# Altium PCB PCB1.PcbDoc
Units mil, origin at the board's own origin, x right, y up, seen from the top; angles counter-clockwise.
Board outline 3505 x 3705 mil, 2 copper layers (Top Layer, Bottom Layer); 31 components, 22 nets, 141 pads, 12 vias.
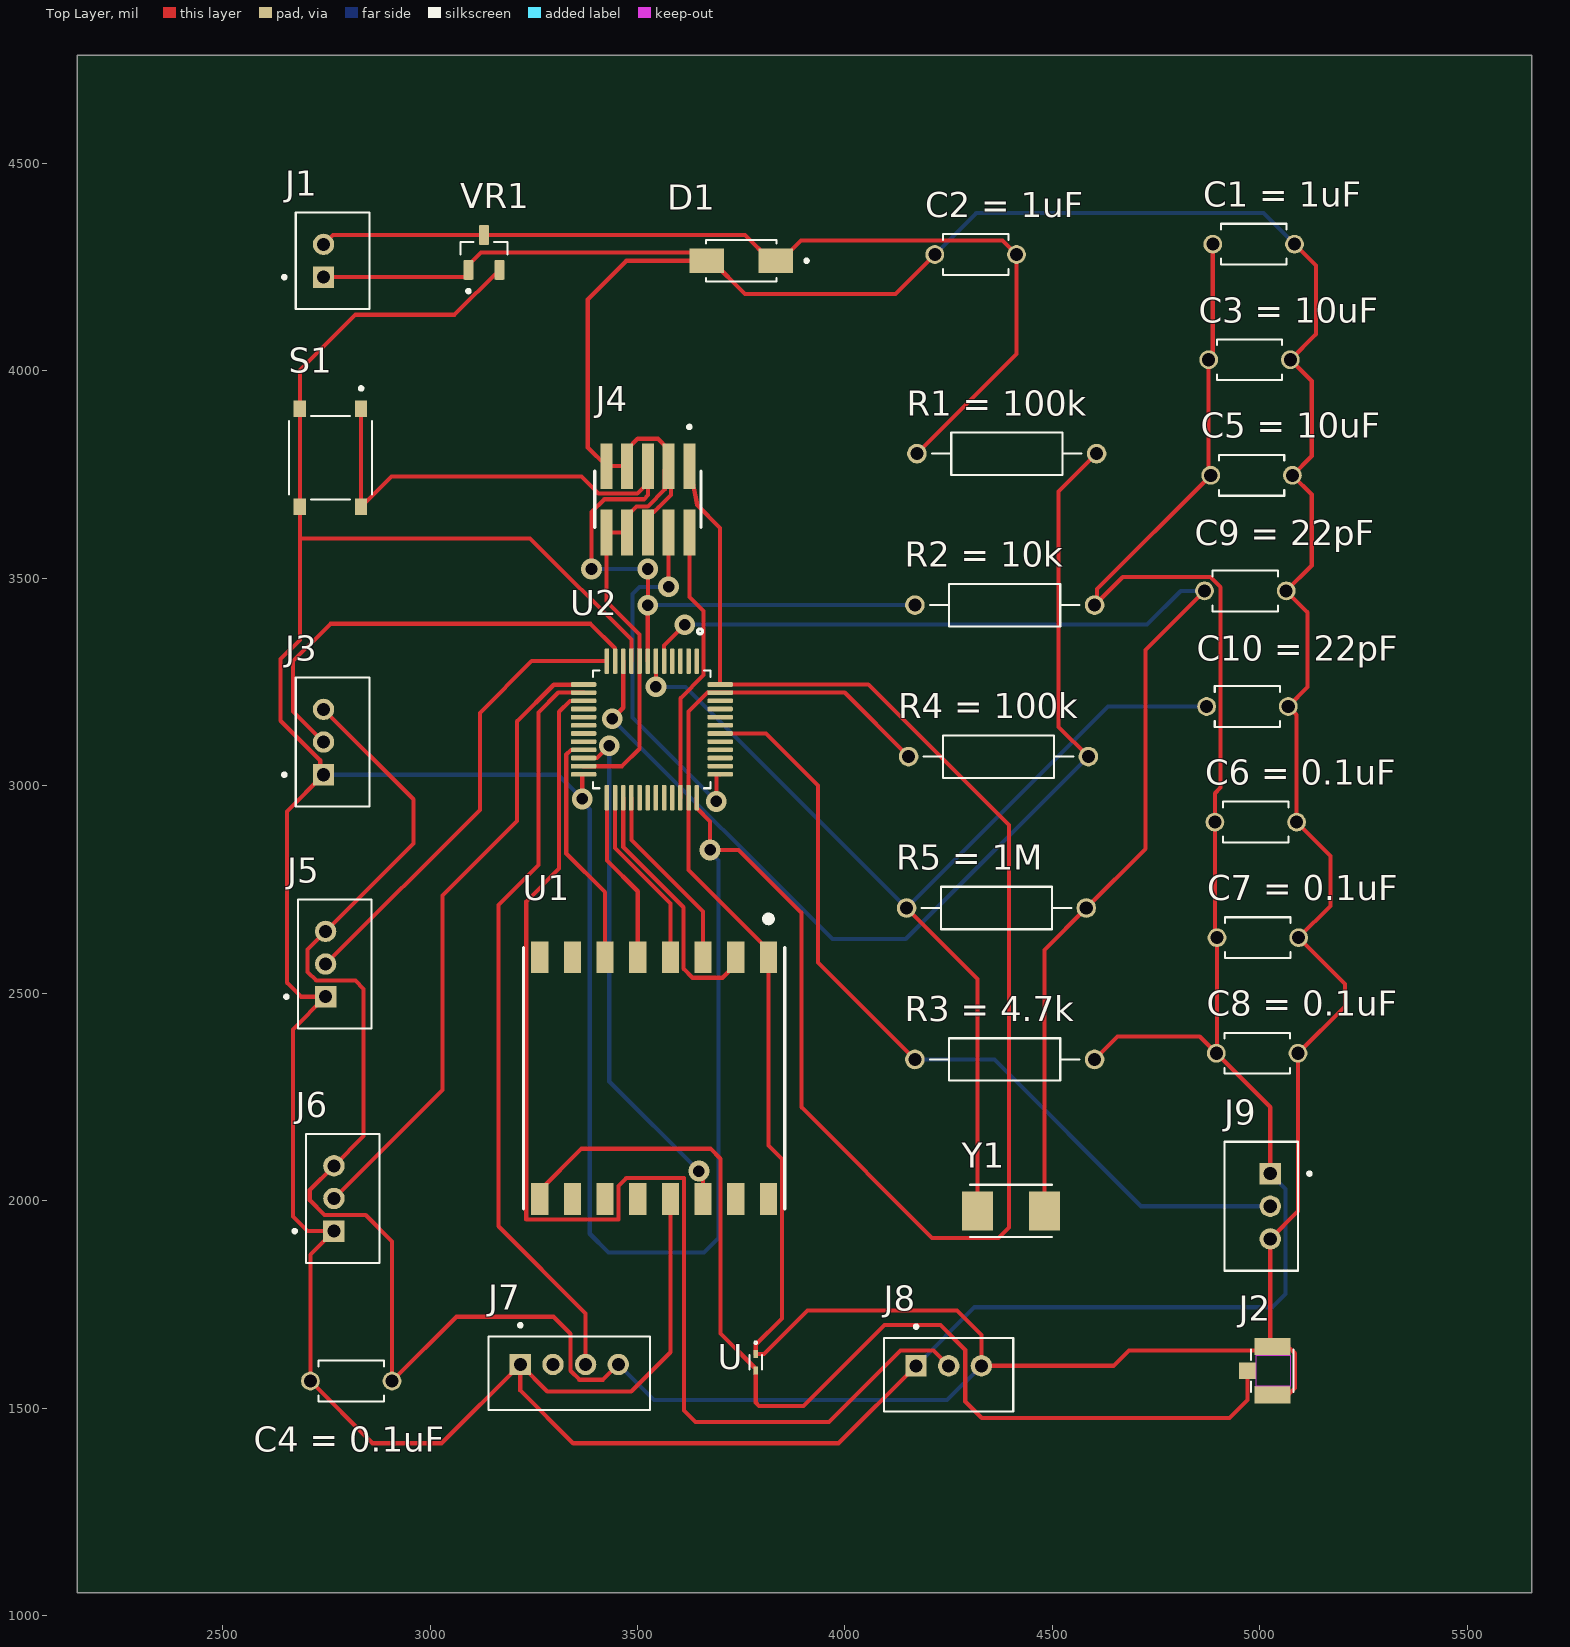
[diagram p0: Top Layer view]
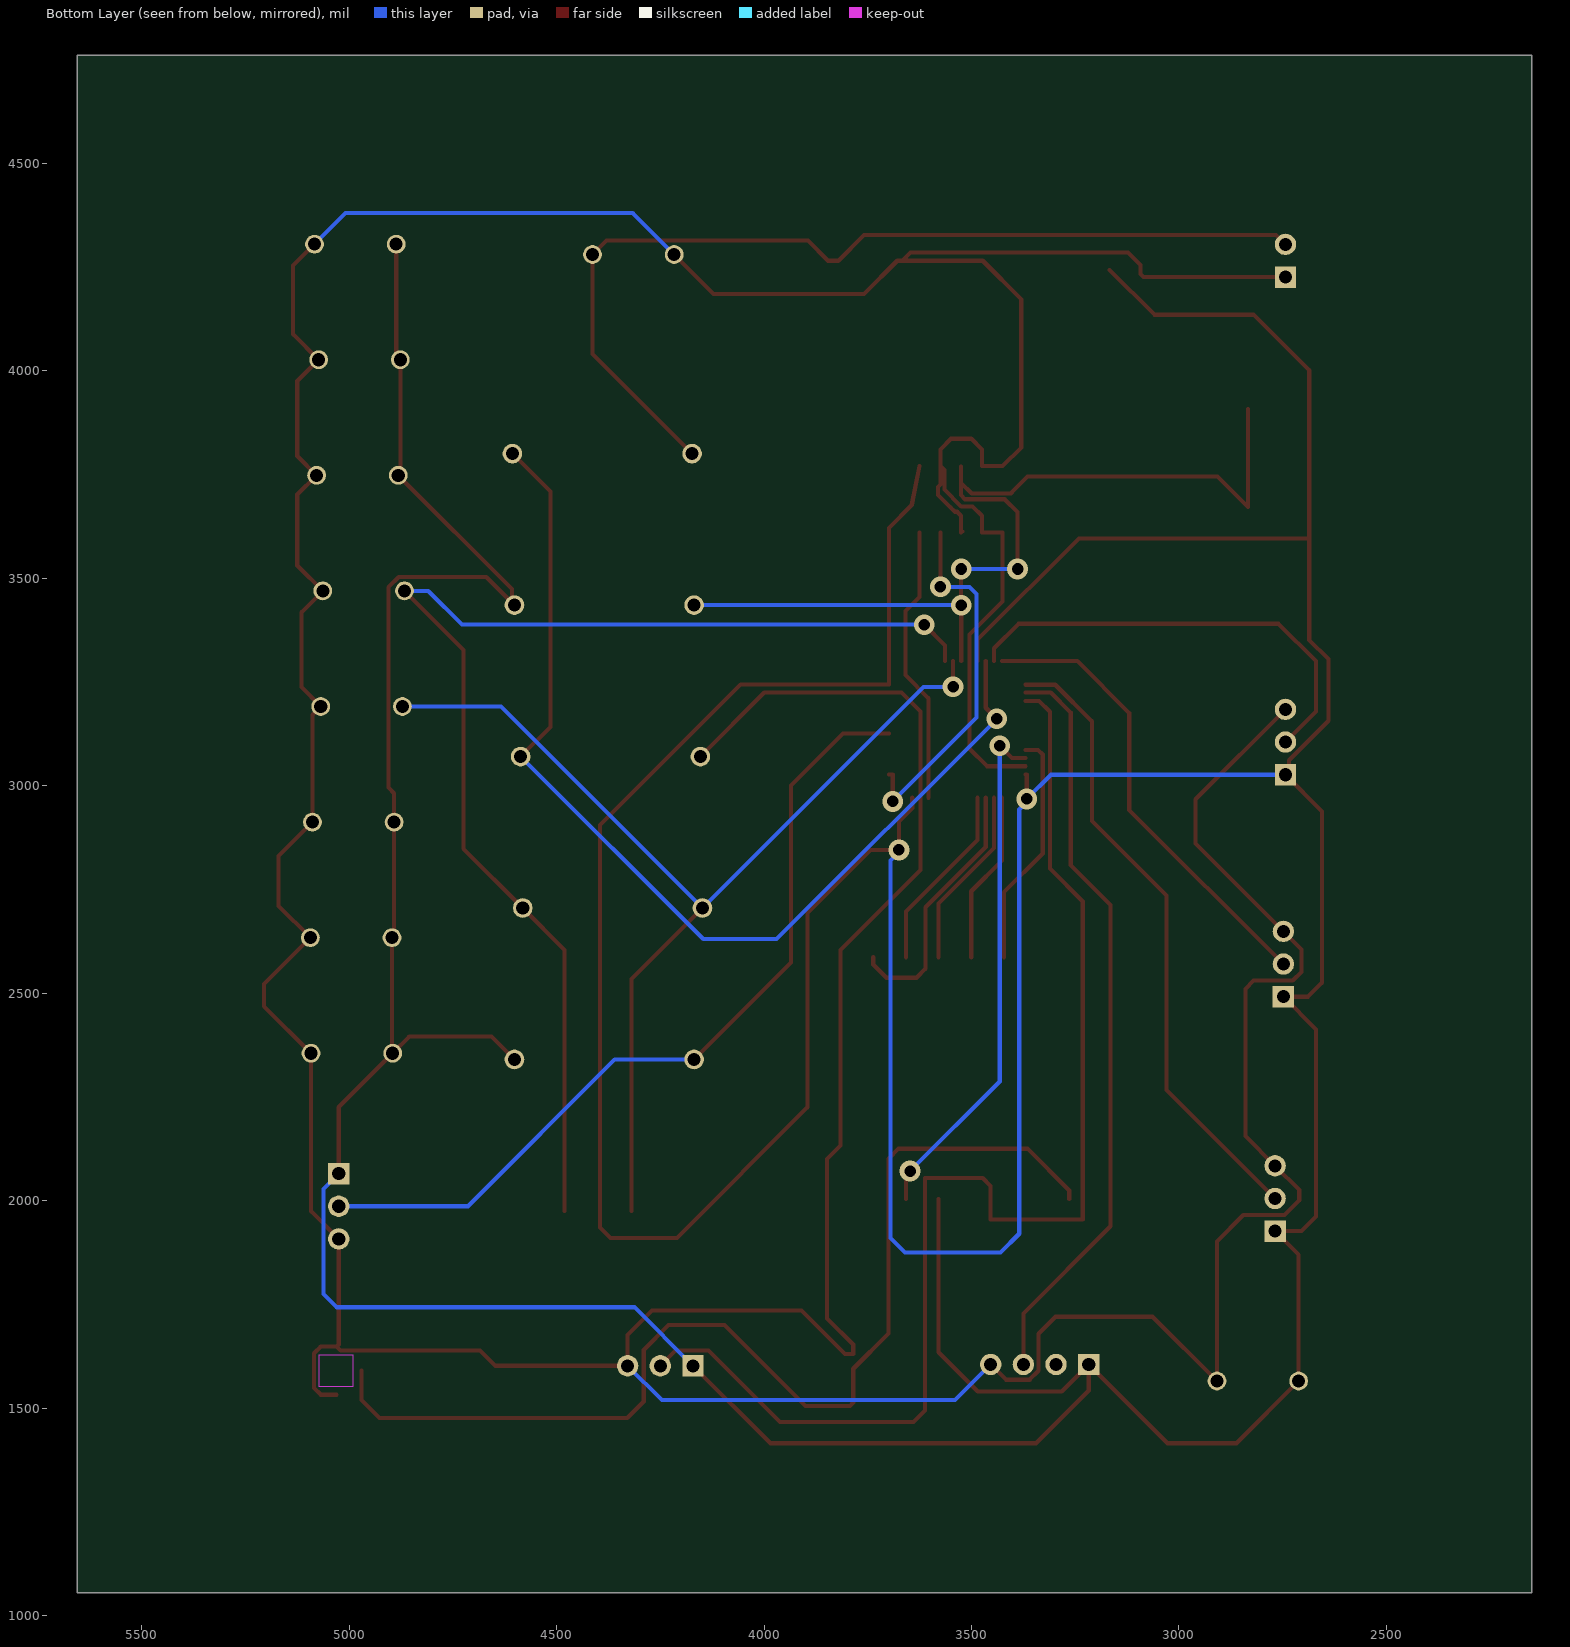
[diagram p1: Bottom Layer view, seen from below]
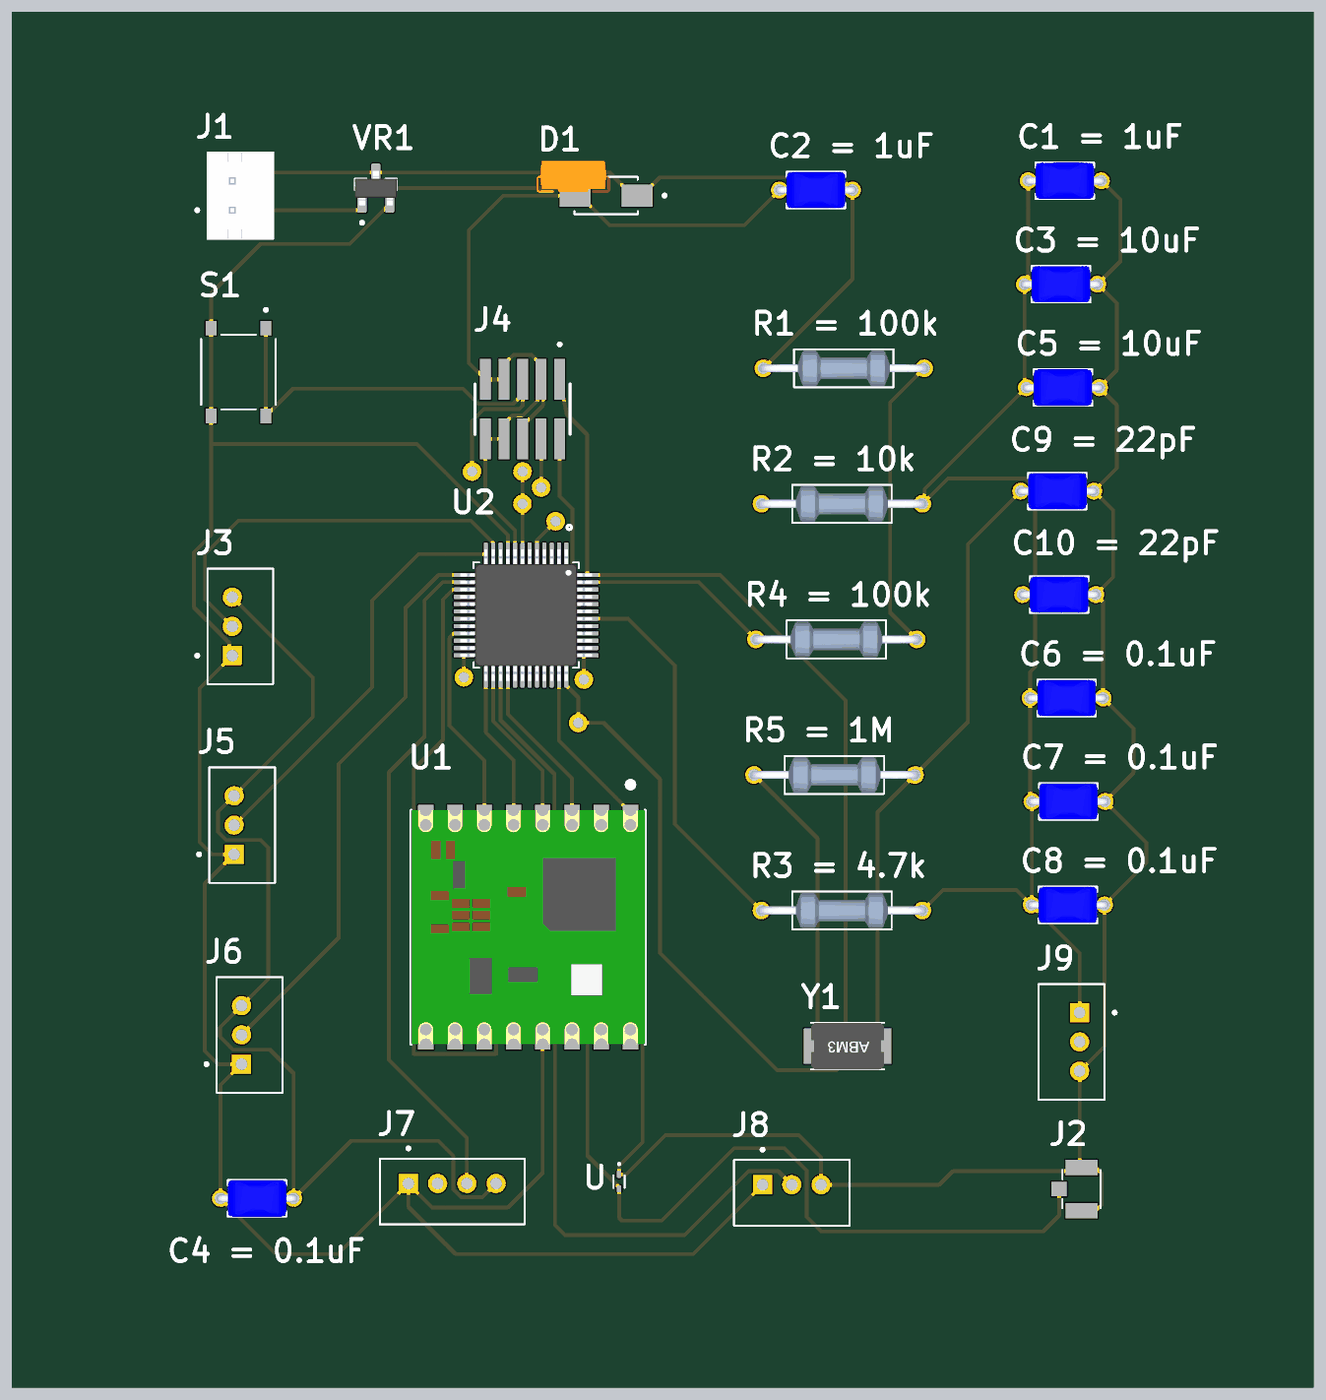
[diagram p2: 3D render of the assembled board from above, using the file's embedded part models]

## Layer stack, top to bottom
Top Solder: solder mask 0.4, Solder Resist, Dk 3.5
Top Layer: signal copper 1.4
Dielectric 1: dielectric 12.6, FR-4, Dk 4.8
Bottom Layer: signal copper 1.4
Bottom Solder: solder mask 0.4, Solder Resist, Dk 3.5

## Board outline
2150,1055 2150,4760 5655,4760 5655,1055

## Design rules (kind name [scope] priority, off if disabled: settings)
Clearance [All] p1: gap=6 ignorepadtopadclearanceinfootprint=TRUE
PolygonConnect [All] p1: connectstyle=Relief reliefconductorwidth=10 reliefentries=4 polygonreliefangle="90 Angle" airgapwidth=10
RoutingVias [All] p1: holewidth=28 width=50 viastyle="Through Hole" minholewidth=28 minwidth=50 maxholewidth=28 maxwidth=50
SolderMaskExpansion [All] p1: expansion=4 istentingtop=FALSE
SupplyNets "Schematic Supply Nets" [InNet('GND')] p1: voltage=0.000
Width [All] p1: maxlimit=10 minlimit=10 preferedwidth=10
30 further rules are at their usual default settings.

## Components (designator, comment, footprint, x,y, rotation, side; value= is the part's Value field where it differs from the comment)
"C1 = 1uF" "FA28X7R1H474KRU06" CAPRB500W50L400T250H550 4985,4305 r180 top (schematic designator C1)
"C2 = 1uF" "FA28X7R1H474KRU06" CAPRB500W50L400T250H550 4315,4280 r0 top (schematic designator C2)
"C3 = 10uF" "FA28X7R1H474KRU06" CAPRB500W50L400T250H550 4975,4026.43 r180 top (schematic designator C3)
"C4 = 0.1uF" "FA28X7R1H474KRU06" CAPRB500W50L400T250H550 2810,1565 r0 top (schematic designator C4)
"C5 = 10uF" "FA28X7R1H474KRU06" CAPRB500W50L400T250H550 4980,3747.86 r0 top (schematic designator C5)
"C6 = 0.1uF" "FA28X7R1H474KRU06" CAPRB500W50L400T250H550 4990,2912.14 r0 top (schematic designator C6)
"C7 = 0.1uF" "FA28X7R1H474KRU06" CAPRB500W50L400T250H550 4995,2633.57 r0 top (schematic designator C7)
"C8 = 0.1uF" "FA28X7R1H474KRU06" CAPRB500W50L400T250H550 4993.43,2355 r0 top (schematic designator C8)
"C9 = 22pF" "FA28X7R1H474KRU06" CAPRB500W50L400T250H550 4965,3469.29 r0 top (schematic designator C9)
"C10 = 22pF" "FA28X7R1H474KRU06" CAPRB500W50L400T250H550 4970,3190.71 r0 top (schematic designator C10)
D1 "SS14" DIOM4325X250N 3750,4265 r180 top
J1 "B2B-PH-K-S" JST_B2B-PH-K-S 2765,4265 r270 top
J2 "U.FL-R-SMT-1(10)" HRS_U.FL-R-SMT-1(10) 5030.04,1590 r270 top
J3 "B3B-PH-K-S" JST_B3B-PH-K-S 2765,3105 r270 top
J4 "FTSH-105-01-X-DV-K-X" SAMTEC_FTSH-105-01-X-DV-K-X 3525,3690 r180 top
J5 "B3B-PH-K-S" JST_B3B-PH-K-S 2770,2570 r270 top
J6 "B3B-PH-K-S" JST_B3B-PH-K-S 2790,2005 r270 top
J7 "B4B-PH-K-S" JST_B4B-PH-K-S 3335.63,1583.35 r180 top
J8 "B3B-PH-K-S" JST_B3B-PH-K-S 4250,1580 r180 top
J9 "B3B-PH-K-S" JST_B3B-PH-K-S 5003.35,1986.26 r90 top
"R1 = 100k" "MFR-25FBF52-10K" RESAD1100W55L680D260 4390,3800 r0 top (schematic designator R1)
"R2 = 10k" "MFR-25FBF52-10K" RESAD1100W55L680D260 4385,3435 r0 top (schematic designator R2)
"R3 = 4.7k" "MFR-25FBF52-10K" RESAD1100W55L680D260 4385,2340 r0 top (schematic designator R3)
"R4 = 100k" "MFR-25FBF52-10K" RESAD1100W55L680D260 4370,3070 r0 top (schematic designator R4)
"R5 = 1M" "MFR-25FBF52-10K" RESAD1100W55L680D260 4365,2705 r0 top (schematic designator R5)
S1 "TS-1187A-B-A-B" SW_TS-1187A-B-A-B 2760,3790 r270 top
U "ESD9B5.0ST5G" SODFL1006X40N 3785,1610.32 r270 top
U1 "RFM95W-868S2" XCVR_RFM95W-868S2 3540,2295 r270 top
U2 "STM32F103C8T6" QFP50P900X900X160-48N 3534.53,3135.43 r270 top
VR1 "MCP1700T-3302E_TT" SOT95P237X112-3N 3130,4285 r90 top
Y1 "ABM3-8.000MHZ-D2Y-T" XTAL_ABM3-8.000MHZ-D2Y-T 4400,1975 r180 top

## Footprints (in the part's own frame and the unit in brackets; to place one, negate y for a bottom-side part, rotate by r counter-clockwise, add the part's x,y. Pads: shape width x height; smd on the part's side, far side on the other; paste and mask are expansions set on the pad)
CAPRB500W50L400T250H550 [mm]
  round 1.15 hole 0.8 mask+0.102: 1(-2.5,0) 2(2.5,0)
  silkscreen extent -2,-1.25 2,1.25, body extent -2.75,-1.25 2.75,1.25, height 5.5
DIOM4325X250N [mm]
  rect 2.12x1.5 smd paste+0 mask+0.102: A(2.115,0) C(-2.115,0)
  silkscreen extent -4.1,-1.28 2.16,1.28, body extent -0.28,-2.37 4.77,-0.2, height 2.45
HRS_U.FL-R-SMT-1(10) [mm]
  rect 1.05x2.2 smd: 1(-1.475,0) 3(1.475,0)
  rect 1x1.05 smd: 2(0,-1.525)
  Keep-Out Layer region: 0.95,-1 -0.95,-1 -0.95,1.1 0.95,1.1
  silkscreen extent -1.3,-1.3 1.3,1.3
JST_B2B-PH-K-S [mm]
  rect 1.308x1.308 / inner round 1.308 / far side rect 1.308x1.308 hole 0.8: 1(1,-0.55)
  round 1.308 hole 0.8: 2(-1,-0.55)
  silkscreen extent -2.95,-3.05 2.95,2.25, body extent -2.95,-2.25 2.95,2.25, height 6
JST_B3B-PH-K-S [mm]
  rect 1.308x1.308 / inner round 1.308 / far side rect 1.308x1.308 hole 0.8: 1(2,-0.55)
  round 1.308 hole 0.8: 2(0,-0.55) 3(-2,-0.55)
  silkscreen extent -3.95,-3.05 3.95,2.25
JST_B4B-PH-K-S [mm]
  rect 1.308x1.308 / inner round 1.308 / far side rect 1.308x1.308 hole 0.8: 1(3,-0.55)
  round 1.308 hole 0.8: 2(1,-0.55) 3(-1,-0.55) 4(-3,-0.55)
  silkscreen extent -4.95,-3.05 4.95,2.25
QFP50P900X900X160-48N [mm]
  rrect50% 1.56x0.28 smd: 1(-4.18,2.75) 2(-4.18,2.25) 3(-4.18,1.75) 4(-4.18,1.25) 5(-4.18,0.75) 6(-4.18,0.25) 7(-4.18,-0.25) 8(-4.18,-0.75) 9(-4.18,-1.25) 10(-4.18,-1.75) 11(-4.18,-2.25) 12(-4.18,-2.75) 25(4.18,-2.75) 26(4.18,-2.25) 27(4.18,-1.75) 28(4.18,-1.25) 29(4.18,-0.75) 30(4.18,-0.25) 31(4.18,0.25) 32(4.18,0.75) 33(4.18,1.25) 34(4.18,1.75) 35(4.18,2.25) 36(4.18,2.75)
  rrect50% 0.28x1.56 smd: 13(-2.75,-4.18) 14(-2.25,-4.18) 15(-1.75,-4.18) 16(-1.25,-4.18) 17(-0.75,-4.18) 18(-0.25,-4.18) 19(0.25,-4.18) 20(0.75,-4.18) 21(1.25,-4.18) 22(1.75,-4.18) 23(2.25,-4.18) 24(2.75,-4.18) 37(2.75,4.18) 38(2.25,4.18) 39(1.75,4.18) 40(1.25,4.18) 41(0.75,4.18) 42(0.25,4.18) 43(-0.25,4.18) 44(-0.75,4.18) 45(-1.25,4.18) 46(-1.75,4.18) 47(-2.25,4.18) 48(-2.75,4.18)
  silkscreen extent -6.15,-3.6 3.6,3.6, body extent -4.5,-4.5 4.5,4.5, height 1.6
RESAD1100W55L680D260 [mm]
  round 1.2 hole 0.8: 1(-5.5,0) 2(5.5,0)
  silkscreen extent -4.58,-1.3 4.58,1.3, body extent -5.77,-1.2 5.77,1.2, height 2.4
SAMTEC_FTSH-105-01-X-DV-K-X [mil]
  rect 29x110 smd paste+0 mask+4.02: 01(-100,-80) 02(-100,80) 03(-50,-80) 04(-50,80) 05(0,-80) 06(0,80) 07(50,-80) 08(50,80) 09(100,-80) 10(100,80)
  silkscreen extent -128,-178 128,68
SODFL1006X40N [mm]
  rrect50% 0.5x0.3 smd: 1(-0.5,0) 2(0.5,0)
  silkscreen extent -1.28,-0.38 0.43,0.38
SOT95P237X112-3N [mm]
  rrect25% 1.22x0.62 smd: 1(-1.065,0.95) 2(-1.065,-0.95) 3(1.065,0)
  silkscreen extent -2.46,-1.43 0.64,1.43, body extent -1.18,-1.45 1.18,1.45, height 1.12
SW_TS-1187A-B-A-B [mm]
  rect 1x0.75 smd: A(-3,1.875) B(3,1.875) C(-3,-1.875) D(3,-1.875)
  silkscreen extent -4.35,-2.55 2.55,2.55
XCVR_RFM95W-868S2 [mm]
  rect 1.95x1.05 smd: 1(-7.4,7) 2(-7.4,5) 3(-7.4,3) 4(-7.4,1) 5(-7.4,-1) 6(-7.4,-3) 7(-7.4,-5) 8(-7.4,-7) 9(7.4,-7) 10(7.4,-5) 11(7.4,-3) 12(7.4,-1) 13(7.4,1) 14(7.4,3) 15(7.4,5) 16(7.4,7)
  silkscreen extent -10.04,-8 8,8, body extent -8,-8 8,8, height 1.8
XTAL_ABM3-8.000MHZ-D2Y-T [mm]
  rect 1.9x2.4 smd: 1(-2.05,0) 2(2.05,0)
  silkscreen extent -2.5,-1.6 2.5,1.6, body extent -2.5,-1.6 2.5,1.6, height 1.3

## Part data
"C1 = 1uF" "C2 = 1uF" "C3 = 10uF" "C4 = 0.1uF" "C5 = 10uF" "C6 = 0.1uF" "C7 = 0.1uF" "C8 = 0.1uF" "C9 = 22pF" "C10 = 22pF": "0.47 ÂµF Â±10% 50V Ceramic Capacitor X7R Radial", Package="RADIAL-2 TDK", Check_prices=https://www.snapeda.com/parts/FA28X7R1H474KRU06/TDK/view-part/?ref=eda, MF=TDK, MP=FA28X7R1H474KRU06, SnapEDA_Link=https://www.snapeda.com/parts/FA28X7R1H474KRU06/TDK/view-part/?ref=snap
D1: "1A, 40V, Schottky Rectifier", Package="SMA-2 Taiwan Semiconductor", Check_prices=https://www.snapeda.com/parts/SS14/taiwan/view-part/?ref=eda, MF="Taiwan Semiconductor", MP=SS14, SnapEDA_Link=https://www.snapeda.com/parts/SS14/taiwan/view-part/?ref=snap
J1: "Connector Header Through Hole 2 position 0.079 (2.00mm)", Package=None, Check_prices=https://www.snapeda.com/parts/B2B-PH-K-S/JST/view-part/?ref=eda, MF="JST Sales America Inc.", MP=B2B-PH-K-S, SnapEDA_Link=https://www.snapeda.com/parts/B2B-PH-K-S/JST/view-part/?ref=snap
J2: "U.FL Series 6 Ghz 50 Ohm Ultra-small SMT Coaxial Cable Receptacle", Package=None, Availability=Unavailable, MP=U.FL-R-SMT-1(10), Price=None
J3 J4 J5 J6 J7 J8 J9: Package=None, Availability=Unavailable, Price=None
  J3 J5 J6 J8 J9: MF="{'manufacturer': u'JST Sales America Inc.'}", MP=B3B-PH-K-S
  J4: MF="{'manufacturer': u'Samtec Inc.'}", MP=FTSH-105-01-X-DV-K-X
  J7: MF="{'manufacturer': u'JST Sales America Inc.'}", MP=B4B-PH-K-S
"R1 = 100k" "R2 = 10k" "R3 = 4.7k" "R4 = 100k" "R5 = 1M": "10.2 kOhms Â±1% 0.25W, 1/4W Through Hole Resistor Axial - Metal Film", Package="RADIAL-2 YAGEO", Check_prices=https://www.snapeda.com/parts/MFR-25FBF52-10K/Yageo/view-part/?ref=eda, MF=Yageo, MP=MFR-25FBF52-10K, SnapEDA_Link=https://www.snapeda.com/parts/MFR-25FBF52-10K/Yageo/view-part/?ref=snap
S1: "SPST 50mA @ 12VDC Top Actuated Round Button 160gf SMD Tactile Switches RoHS", Package=None, Availability=Unavailable, MP=TS-1187A-B-A-B, Price=None
U: "Clamp Ipp Tvs Diode Surface Mount SOD-923", Package="SOD-923 ON Semiconductor", Availability=Unavailable, MF="ON Semiconductor", MP=ESD9B5.0ST5G, Price=None, SnapEDA_Link=https://www.snapeda.com/parts/ESD9B5.0ST5G/ON%20Semiconductor/view-part/239806/?ref=snap
U1: "General ISM < 1GHz LoRaâ„¢ Transceiver Module 868MHz Antenna Not Included Surface Mount", Package="Non Standard RF Solutions", Availability="In Stock", Check_prices=https://www.snapeda.com/parts/RFM95W-868S2/RF+Solutions/view-part/?ref=eda, MF=RF, MP=RFM95W-868S2, Price=None, Purchase-URL=https://pricing.snapeda.com/search?q=RFM95W-868S2&ref=eda, SnapEDA_Link=https://www.snapeda.com/parts/RFM95W-868S2/RF+Solutions/view-part/?ref=snap
U2: "ARM® Cortex®-M3 STM32F1 Microcontroller IC 32-Bit 72MHz 64KB (64K x 8) FLASH 48-LQFP (7x7)", Package="LQFP-48 STMicroelectronics", Check_prices=https://www.snapeda.com/parts/STM32F103C8T6/STMicroelectronics/view-part/?ref=eda, MF=STMicroelectronics, MP=STM32F103C8T6, SnapEDA_Link=https://www.snapeda.com/parts/STM32F103C8T6/STMicroelectronics/view-part/?ref=snap
VR1: "Pwr Sply Func,Voltage Regulator,LDO,SOT-23,PD 369.6mW,VO 3.3V,Regline +/-0.75%/V", Package="SOT-23 Microchip", Check_prices=https://www.snapeda.com/parts/MCP1700T-3302E/TT/Microchip/view-part/?ref=eda, MF=Microchip, MP=MCP1700T-3302E/TT, SnapEDA_Link=https://www.snapeda.com/parts/MCP1700T-3302E/TT/Microchip/view-part/?ref=snap
Y1: "8 MHz Â±20ppm Crystal 18pF 140 Ohms 2-SMD, No Lead", Package="SMD-2 Abracon", Availability="In Stock", Check_prices=https://www.snapeda.com/parts/ABM3-8.000MHZ-D2Y-T/Abracon+LLC/view-part/?ref=eda, MF=Abracon, MP=ABM3-8.000MHZ-D2Y-T, Price=None, Purchase-URL=https://pricing.snapeda.com/search/part/ABM3-8.000MHZ-D2Y-T/?ref=eda, SnapEDA_Link=https://www.snapeda.com/parts/ABM3-8.000MHZ-D2Y-T/Abracon+LLC/view-part/?ref=snap

## Via types
v1: diameter 50, hole 28, Top Layer to Bottom Layer, 12 vias

## Nets (pads, with @x,y where several pads share a name; then routed paths per layer and width w, separated by ;. In a path a pad name is that pad's centre, name@x,y a point inside that pad or via, vN(x,y) a via of type N, cw(c..) or ccw(c..) an arc to the next point about the centre after c; other vN are vias at no path point)
Ammonia: J7.3 U2.14 | length 1826.6
  Top Layer w10: U2.14 3308.96,3224.02 3261,3176.05 3261,2808.27 3165,2712.27 3165,1938 3375,1728 J7.3
BD: "R1 = 100k.2" "R4 = 100k.2" U2.10 | length 2497.3
  Top Layer w10: v1(3439,3161) 3465.63,3187.63 U2.10 ; 4586.54,3070 4515,3141.54 4515,3708.46 4606.54,3800
  Bottom Layer w10: v1(3439,3161) 3970,2630 4146.54,2630 4586.54,3070
DO: J8.2 U2.15 | length 3091.7
  Top Layer w10: U2.15 3337.33,3204.33 3311,3178 3311,2800 3232,2721 3232,1954 3454,1954 3454,2035 3473,2054 3612,2054 3612,1494 3640,1466 3961.6,1466 4134,1638.4 4213.25,1638.4 J8.2
GND: "C1 = 1uF.1" "C2 = 1uF.1" "C3 = 10uF.1" "C4 = 0.1uF.2" "C5 = 10uF.2" "C6 = 0.1uF.2" "C7 = 0.1uF.2" "C8 = 0.1uF.2" "C9 = 22pF.2" "C10 = 22pF.2" "R4 = 100k.1" D1.A J1.1 J2.1 J2.3 J3.3 J4.03 J4.06 J4.07 J4.08 J4.09 J4.10 J5.3 J6.3 J7.4 J8.3 J9.3 U1.1 U2.8 U2.23 U2.35 U2.47 U.1 VR1.1 | length 15419.1
  Top Layer w10: J3.3 2960,2967.09 2960,2860.39 J5.3 2705,2605.39 2705,2550.86 2725.86,2530 2820,2530 2840,2510 2840,2155.39 J6.3 2710,2025.39 2710,2000.86 2745.86,1965 2845,1965 2908.43,1901.57 2908.43,1565 3063.43,1720 3297.25,1720 3338.25,1679 3338.25,1589.78 3359.78,1568.25 3416.99,1568.25 J7.4 ; J1.1 3085.39,4225.63 3092.6,4232.83 VR1.1 3092.6,4254.88 3122.72,4285 3646.73,4285 D1.A ; U2.23 3463,3046.85 3505,3088.85 U2.8 3505,3364 3425,3444 J4.10 J4.08 3475,3650.5 3497.22,3672.72 3524.59,3672.72 3525.87,3674 3526.04,3674 3565.5,3713.46 3565.5,3760.5 J4.03 ; J4.06@3522.36,3612.64 J4.06 3525,3650.5 3534.5,3660 3540,3660 3549.5,3669.5 3549.5,3669.56 3580.36,3700.41 3580.36,3720 3575,3725.36 J4.03 ; 4153.46,3070 3999.45,3224.02 U2.47 3668.62,3224.02 3623.11,3178.51 U2.35 3623.11,2796.54 3815.59,2604.06 U1.1 3815.59,2132.41 3848,2100 3848,1716 3785,1653 U.1 3805,1630 3910,1735 4270,1735 4328.74,1676.26 J8.3 4647.47,1601.65 4684.23,1638.41 5020.38,1638.41 J2.1 ; 4216.57,4280 4121.57,4185 3758.94,4185 3678.94,4265 D1.A ; J2.3 5068.23,1531.93 5084.35,1548.04 5084.35,1631.96 5068.24,1648.07 J2.1 ; 5083.43,4305 5135,4253.43 5135,4088 5073.43,4026.43 5125,3974.85 5125,3794.43 5078.43,3747.86 5125,3701.28 5125,3530.86 5063.43,3469.29 5115,3417.71 5115,3237.29 5068.43,3190.71 5088.43,3170.71 5088.43,2912.14 5170,2830.57 5170,2710.15 5093.43,2633.57 5205,2522 5205,2468.15 5091.85,2355 5091.85,1974.37 J9.3 5025,1653.11 J2.1 ; J4.03 3575,3810.5 3549.5,3836 3500.5,3836 3475,3810.5 J4.07 J4.09 3380,3815 3380,4172 3473,4265 D1.A
  Bottom Layer w10: J7.4 3539.74,1519 4246.09,1519 J8.3 ; 4216.57,4280 4316.57,4380 5008.43,4380 5083.43,4305
MISO: U1.2 U2.27 | length 638
  Top Layer w10: U2.27 3465.63,2852.35 3611.04,2706.94 3611.04,2558.8 3632.88,2536.95 3705.18,2536.95 3736.85,2568.62 U1.2
MOSI: U1.3 U2.28 | length 456.1
  Top Layer w10: U2.28 3485.32,2869.09 3658.11,2696.3 U1.3
NetC1_2: "C1 = 1uF.2" "C3 = 10uF.2" "C4 = 0.1uF.1" "C5 = 10uF.1" "C6 = 0.1uF.1" "C7 = 0.1uF.1" "C8 = 0.1uF.1" "R2 = 10k.2" "R3 = 4.7k.2" J3.1 J4.01 J5.1 J6.1 J7.1 J8.1 J9.1 S1.C S1.D U1.13 U2.9 U2.24 U2.36 U2.48 VR1.2 | length 18234.5
  Top Layer w10: VR1.2 3059.33,4135 2820,4135 2686.18,4001.18 S1.C S1.D 2686.18,3597 ; v1(3367,2968) 3367,3027.17 U2.24 ; U2.9 3485.32,3352 3241.32,3596 2687.18,3596 2686.18,3597 ; U1.13 3579.37,1634.37 3485,1540 3282.52,1540 J7.1 ; J4.01 3644.06,3676 3699.09,3620.96 U2.48 4056.3,3243.7 4395,2905 4395,1935 4370,1910 4210,1910 3895,2225 3895,2693.46 3743.46,2845 v1(3675,2845) 3675,2913.47 U2.36@3642.8,2945.67 ; J8.1 3984.61,1415 3345,1415 3217.52,1542.48 J7.1 ; 4601.54,2340 4656.54,2395 4855,2395 4895,2355 ; 4601.54,3435 4607.34,3440.8 ; 4886.57,4305 4886.57,4036.43 4876.57,4026.43 4876.57,3752.86 4881.57,3747.86 4607.34,3473.62 4607.34,3440.8 ; J9.1 5025,2225 4895,2355 ; 2686.18,3597 2686.18,3351.18 2640,3305 2640,3156.38 2735.23,3061.15 2735.23,3034.38 J3.1 2655,2937.91 2655,2525 2688.74,2491.26 J5.1 2669.48,2412.39 2669.48,1961.78 2705,1926.26 J6.1 2711.57,1869.49 2711.57,1565 2861.57,1415 3027.52,1415 J7.1 ; U2.36@3642.8,2945.67 U2.36 U2.36@3642.8,2945.67 ; 4607.34,3440.8 4669.46,3502.92 4880.51,3502.92 4905.21,3478.22 4905.21,2995.21 4891.57,2981.57 4891.57,2912.14 4891.57,2638.57 4896.57,2633.57 4896.57,2356.57 4895,2355
  Bottom Layer w10: J3.1 3308.74,3026.26 v1(3367,2968) 3367,2960.14 3385,2942.14 3385,1920 3430,1875 3660,1875 3695,1910 3695,2819.14 3675,2839.14 v1(3675,2845) ; J8.1 4312.61,1743 5030,1743 5062,1775 5062,2028 J9.1
NetC2_2: "C2 = 1uF.2" "R1 = 100k.1" D1.C J1.2 VR1.3 | length 2318.6
  Top Layer w10: J1.2 2765.91,4326.93 VR1.3 3759.13,4326.93 3821.06,4265 D1.C 3845.47,4265 3894.11,4313.64 4379.79,4313.64 4413.43,4280 4413.43,4039.96 4173.46,3800
NetC9_1: "C9 = 22pF.1" "R5 = 1M.2" U2.5 Y1.1 | length 3049
  Top Layer w10: U2.5 3564.06,3338.06 v1(3614,3388) ; Y1.1 4480.71,2604.17 4581.54,2705 4724.24,2847.71 4724.24,3326.95 4866.57,3469.29
  Bottom Layer w10: v1(3614,3388) 4728,3388 4809.29,3469.29 4866.57,3469.29
NetC10_1: "C10 = 22pF.1" "R5 = 1M.1" U2.6 Y1.2 | length 2611.9
  Top Layer w10: v1(3544.37,3238) U2.6 ; 4148.46,2705 4319.29,2534.17 Y1.2
  Bottom Layer w10: v1(3544.37,3238) 3615.46,3238 4148.46,2705 4634.18,3190.71 4871.57,3190.71
NRST: "R2 = 10k.1" J4.05 S1.A S1.B U2.7 | length 2346.2
  Top Layer w10: S1.A S1.B 2906.93,3745 3365.01,3745 3397.72,3712.28 3397.72,3712.22 3405.24,3704.71 ; v1(3389,3522) 3389,3659.06 3419.94,3690 3515.58,3690 3525.58,3700 J4.05@3525.58,3769.42 ; 3405.94,3704 3494.06,3704 3499.5,3704 J4.05@3525,3729.5 ; U2.7 v1(3524.69,3435) 3525,3435.31 v1(3525,3522)
  Bottom Layer w10: v1(3389,3522) v1(3525,3522) ; v1(3524.69,3435) 4168.46,3435
NSS: U1.5 U2.25 | length 415.3
  Top Layer w10: U2.25 3426.26,2819.88 3500.63,2745.51 U1.5
PB11: U1.14 U2.22 | length 1260.2
  Top Layer w10: U2.22 3402.54,3066.54 v1(3432,3096) ; v1(3648,2071) 3658.11,2060.89 U1.14
  Bottom Layer w10: v1(3432,3096) 3432,2287 v1(3648,2071)
pH: J3.2 U2.11 | length 1093.7
  Top Layer w10: J3.2 2670,3178.35 2670,3300 2760,3390 3386.42,3390 3445.43,3330.99 3445.43,3300.51 U2.11
RESET: U1.6 U2.21 | length 573.8
  Top Layer w10: U2.21 3339.48,3086.22 3328.25,3074.99 3328.25,2836.75 3421.89,2743.11 U1.6
RF: J2.2 U1.9 U.2 | length 2654.5
  Top Layer w10: U1.9 3264.41,2024.41 3365,2125 3675.8,2125 3700,2100.8 3700,1679.57 3785,1594.57 U.2 3785,1513 3793,1505 3900,1505 4095,1700 4230,1700 4290,1640 4290,1515.75 4329.75,1476 4927,1476 4970,1519 J2.2
Salinity: J6.2 U2.13 | length 1529.6
  Top Layer w10: J6.2 3030,2266.65 3030,2735 3210,2915 3210,3155 3298.19,3243.19 3369.45,3243.19 U2.13
SCK: U1.4 U2.26 | length 439.8
  Top Layer w10: U2.26 3445.94,2849.41 3579.37,2715.98 U1.4
SWDCLK: J4.04 U2.37 | length 883
  Top Layer w10: v1(3575,3479) J4.04 ; v1(3690,2962) 3690,3027.17 U2.37
  Bottom Layer w10: v1(3575,3479) 3505,3479 3488,3462 3488,3164 v1(3690,2962)
SWDIO: J4.02 U2.34 | length 676.5
  Top Layer w10: U2.34 3603.43,3210.47 3659.31,3266.35 3659.31,3420.69 3625,3455 J4.02
Temperature: "R3 = 4.7k.1" J9.2 U2.42 | length 2047.7
  Top Layer w10: U2.42 3809.41,3125.59 3935,3000 3935,2573.46 4168.46,2340
  Bottom Layer w10: 4168.46,2340 4360,2340 4713.74,1986.26 J9.2
Turbidity: J5.2 U2.12 | length 1117
  Top Layer w10: J5.2 3120,2941.65 3120,3175 3245,3300 U2.12
pads on no net: J7.2 U1.7 U1.8 U1.10 U1.11 U1.12 U1.15 U1.16 U2.1 U2.2 U2.3 U2.4 U2.16 U2.17 U2.18 U2.19 U2.20 U2.29 U2.30 U2.31 U2.32 U2.33 U2.38 U2.39 U2.40 U2.41 U2.43 U2.44 U2.45 U2.46

## Silkscreen, mask and mechanical layers (free items; w line width, h text height)
Mechanical 1:
  the board outline again, w10